# Altium PCB LM-008.PcbDoc (part 2 of 2)
Units mil, origin at the board's own origin, x right, y up, seen from the top; angles counter-clockwise.
Board outline 2402.07 x 2867.53 mil, 4 copper layers (Top Layer, Signal Layer 1, Signal Layer 2, Bottom Layer), stack 30.635 mil thick; 53 components, 52 nets, 456 pads, 38 vias.
Unrouted connection lines stored in the file: 15.
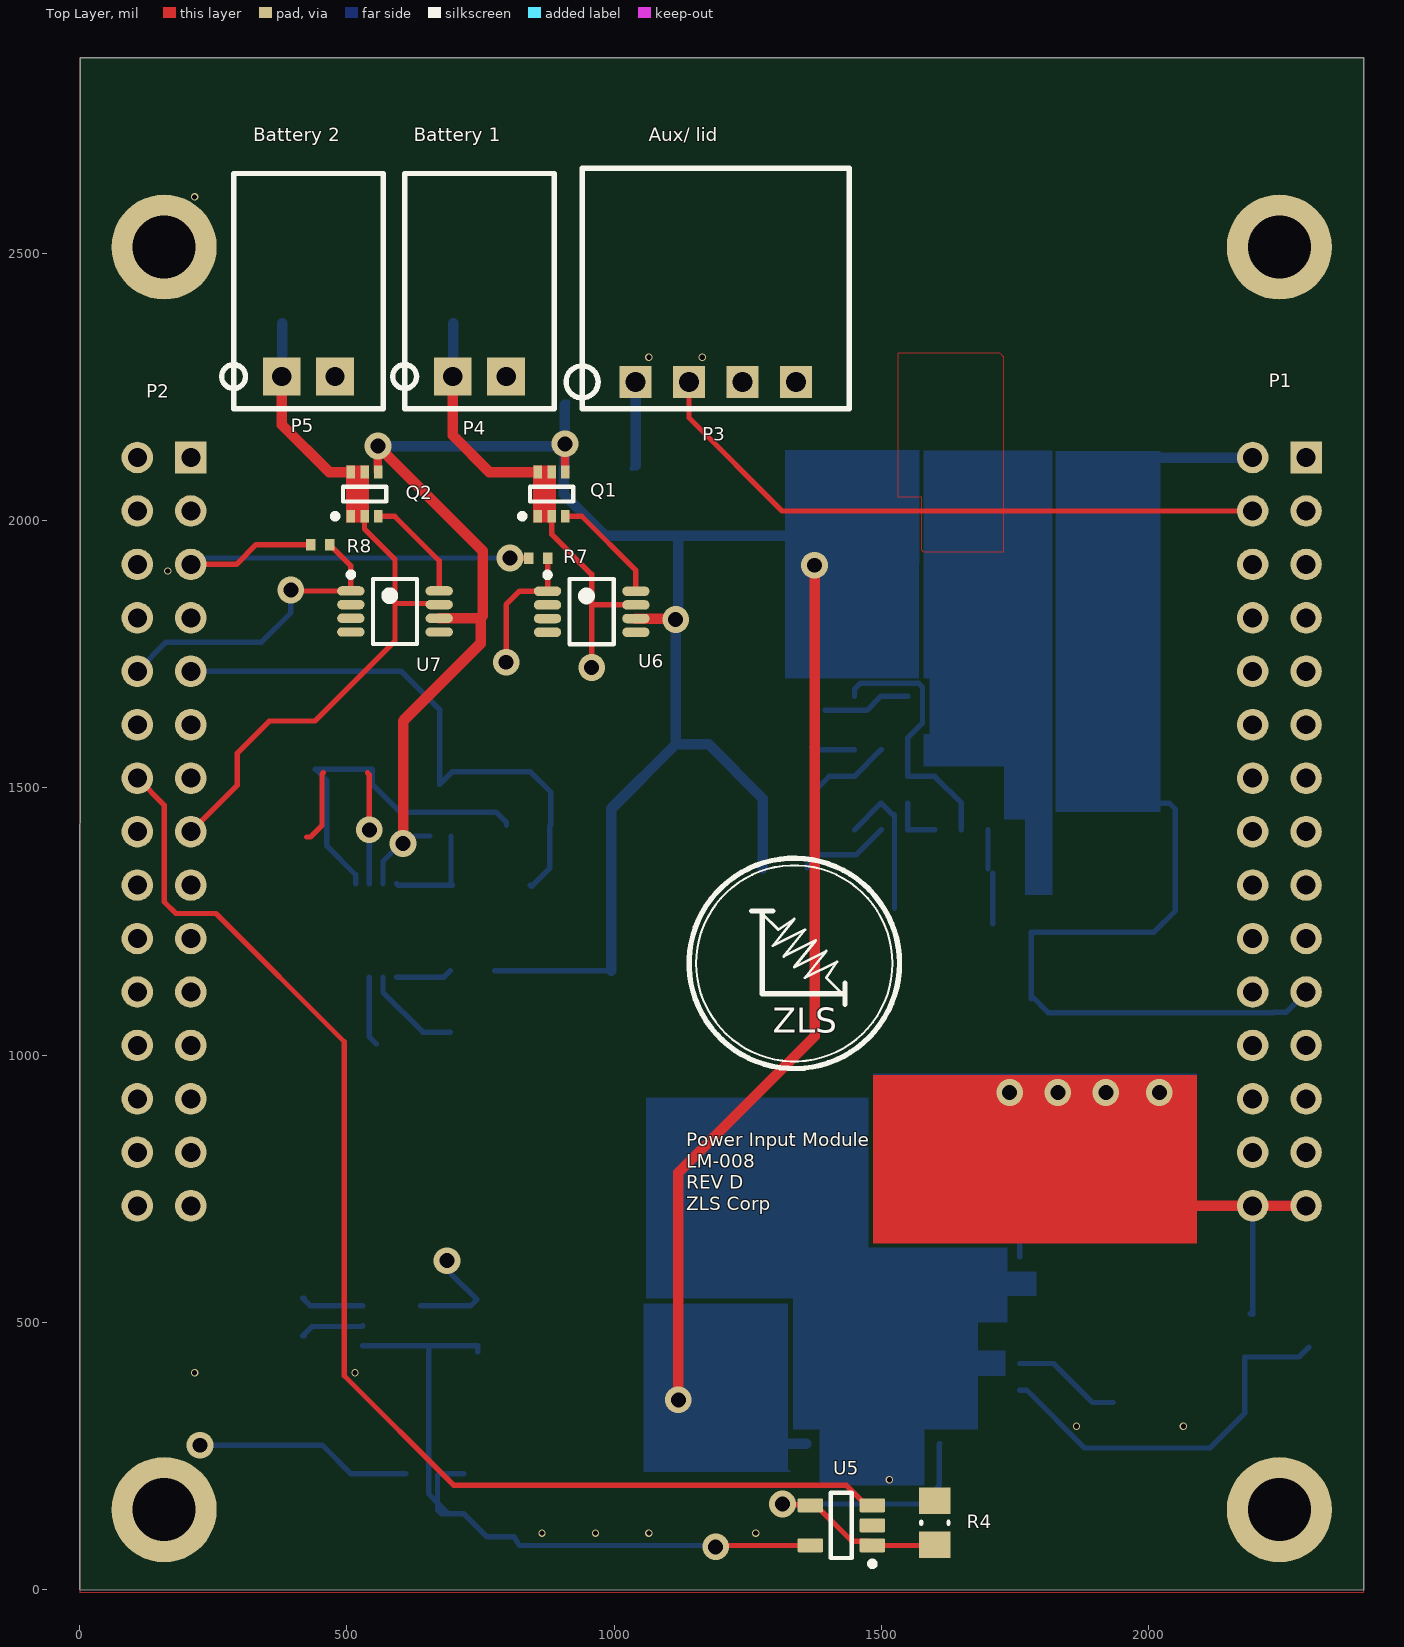
[diagram p0: Top Layer view]

## Via types
v1: diameter 50, hole 28, Top Layer to Bottom Layer, 21 vias
v2: diameter 13.78, hole 9.84, Top Layer to Bottom Layer, 13 vias
v3: diameter 19.68, hole 7.87, Top Layer to Bottom Layer, 4 vias

## Nets (pads, with @x,y where several pads share a name; then routed paths per layer and width w, separated by ;. In a path a pad name is that pad's centre, name@x,y a point inside that pad or via, vN(x,y) a via of type N, cw(c..) or ccw(c..) an arc to the next point about the centre after c; other vN are vias at no path point) (continued)
+5: (continued)
  Bottom Layer w10: U3.4 U3.3 U3.3@653.13,456.44 ; U1.1 672.19,216.5 669.59,213.9 669.59,162.24 ; C9.1 744.57,456.44 U3.3@653.13,456.44 ; v1@1192.6,82.6 822.38,82.6 C2.2 761.38,99.05 U1.3 690.13,141.7 ; 1780,1105 1780,1110.65 1780.43,1111.08 ; U9.J11 U9.J10 ; U9.J4 1882.13,1854.06 ; U9.J3 1882.13,1904.06 ; U9.J2 1882.13,1954.06 ; U9.J1 1882.13,2004.06 ; C27.1 1928.5,2118.08 1928.81,2117.77 ; U9.K11 U9.K10 U9.K9 ; U9.K1 1882.13,1954.06 ; 1929.1,2118.05 1928.81,2117.77 ; U9.L11 U9.L10 U9.L9 ; 1979.73,2120 1981.67,2118.05 ; 1981.15,2003.08 U9.L1 U9.K2 1882.13,1904.06 ; U9.M1 U9.L2 U9.K3 1882.13,1854.06 ; P1.21 2256.62,1080.08 2234.13,1080.08 2233.13,1079.08 1812.43,1079.08 1780.43,1111.08 ; U3.3@653.13,456.44 653.13,178.7 669.59,162.24 ; 669.59,162.24 690.13,141.7 ; 669.59,162.24 669.59,149.1 676.99,141.7 690.13,141.7 ; 1780.43,1111.08 C14.1 2010,1230 2050,1270 2050,1460 2038.5,1471.5 U9.M11 U9.M10 ; U9.J10 U9.J9 U9.J8 U9.J7 ; U9.J10 1882.13,1554.06 1882.13,1588.94 ; U9.J7 U9.J6 U9.J5 ; U9.J7 1882.13,1704.06 ; U9.J5 U9.J5@1851.1,1773.03 ; U9.J5 1849.57,1773.03 U9.J5@1851.1,1773.03 ; U9.J5@1851.1,1773.03 1882.13,1804.06 ; U9.J5@1851.1,1773.03 1882.13,1773.03 ; 1882.13,1588.94 1882.13,1638.94 ; 1882.13,1588.94 U9.K9 ; 1882.13,1638.94 U9.K8 ; 1882.13,1638.94 1882.13,1704.06 ; 1882.13,1704.06 1882.13,1773.03 ; 1882.13,1773.03 1882.13,1804.06 ; 1882.13,1804.06 U9.K4 ; 1882.13,1804.06 1882.13,1854.06 ; 1882.13,1854.06 1882.13,1904.06 ; 1882.13,1904.06 1882.13,1954.06 ; 1882.13,1954.06 1882.13,2004.06 ; 1882.13,2004.06 1882.13,2071.08 1928.81,2117.77 ; U9.K9 U9.K8 ; U9.K8 U9.L7 ; U9.K8 U9.L9 ; U9.K8 U9.K7 U9.K6 U9.K5 U9.K4 ; U9.K4 U9.L3 ; U9.K4 1899.57,1823.03 U9.L3@1949.57,1873.03 ; U9.L9 U9.L8 U9.L7 ; U9.L9 U9.M10 ; U9.L7 U9.M6 ; U9.L7 U9.L6 ; U9.L6 U9.M5 ; U9.L6 U9.L5 ; U9.L5 U9.M4 ; U9.L5 U9.L4 ; U9.L4 U9.M3 ; U9.L4 U9.L3 ; U9.L3 U9.M2 ; U9.L3 U9.L3@1949.57,1873.03 ; U9.L3@1949.57,1873.03 U9.M2@1999.57,1923.03 ; U9.M10 U9.M9 U9.M8 U9.M7 U9.M6 ; U9.M6 U9.M5 ; U9.M5 U9.M4 ; U9.M4 U9.M3 ; U9.M3 U9.M2 ; U9.M2 U9.M2@1999.57,1923.03 ; U9.M2 2001.1,1923.03 U9.M2@1999.57,1923.03
  Bottom Layer w19.68: 1981.67,2118.05 P1.2
+12: C5.2 C15.1 C22.1 L1.1 P1.29 P1.30 P2.13 R1.1 R6.1 U2.3 U4.A1 U4.A2 U4.A3 U4.A4 U4.A5 U4.A6 U4.B1 U4.B2 U4.B3 U4.B4 U4.B5 U4.B6 U4.C1 U4.C2 U4.C3 U4.C4 U4.C5 U4.C6 U4.D1 | length 3337
  Top Layer w10: 1995,730 2006.95,718.05
  Top Layer w19.68: 2006.95,718.05 P1.30 P1.29
  Signal Layer 1 w19.68: P1.30 P1.29
  Signal Layer 2 w19.68: P2.13 261.95,1518.05 300,1480 300,1380 750,930 v1(1740,930)
  Bottom Layer w10: U4.D1 U4.C1 ; R6.1 2194.59,515 P1.30
  Bottom Layer w19.68: P1.30 P1.29 ; v1(2870.82,1357.87) 3040.82,1187.87 v1(3540.82,1187.87)
  other v1: 1830,930 1920,930 2020,930
-5: C10.1 P1.25 P2.17 U3.1 | length 2773.7
  Signal Layer 1 w10: P2.17 321.95,1318.05 687.11,952.89 687.11,870 ; v1(687.11,615.34) 687.11,870 ; P1.25 2293.1,918.05 2244.59,869.55 687.56,869.55 687.11,870
  Bottom Layer w10: U3.1 731.81,531.24 740.06,539.5 743.02,542.46 694.77,590.71
Aux+: D1.1 P3.1 | length 164.5
  Bottom Layer w10: D1.1 D1.1@1039.98,2103.57
  Bottom Layer w19.68: D1.1@1039.98,2103.57 P3.1
Battery_1: C18.2 P2.11 P4.1 Q1.1 Q1.2 Q1.5 Q1.6 U6.7 | length 1730.4
  Top Layer w10: Q1.5 Q1.6 Q1.1 Q1.2 882.98,1974.55 957.98,1899.55 957.98,1842.35 ; v1(957.98,1725) 957.98,1842.35 ; U6.7 957.98,1842.35
  Top Layer w19.68: P4.1 697.98,2159.55 766.64,2090.89 Q1.6
  Signal Layer 1 w10: P2.11 863.06,1618.05 957.98,1712.98 v1(957.98,1725)
  Bottom Layer w10: P4.1 P4.1@698.92,2270.49
  Bottom Layer w19.68: P4.1@698.92,2270.49 C18.2
Battery_2: C19.2 P2.15 P5.1 Q2.1 Q2.2 Q2.5 Q2.6 U7.7 | length 1397.1
  Top Layer w10: P2.15 295,1505.08 295,1565 355,1625 440,1625 590,1775 590,1845 ; Q2.5 Q2.6 Q2.1 Q2.2 532.98,1984.55 590,1927.53 590,1845 ; U7.7 672.68,1845 590,1845
  Top Layer w19.68: P5.1 377.98,2179.55 466.64,2090.89 Q2.6
  Bottom Layer w10: P5.1 P5.1@378.92,2270.49
  Bottom Layer w19.68: P5.1@378.92,2270.49 C19.2
BBB_PWR_SW: P1.4 P3.2 | length 1193.9
  Top Layer w10: P3.2 1139.98,2192.48 1314.4,2018.05 P1.4
FB_CS0: P1.5
GND: C1.1 C2.1 C3.1 C4.1 C5.1 C6.1 C8.1 C9.2 C10.2 C12.2 C13.1 C15.2 C17.1 C18.1 C19.1 C21.1 C22.2 C26.2 C27.2 P1.1 P1.19 P1.20 P1.22 P1.23 P1.24 P1.27 P1.28 P2.3 P2.24 P2.27 P3.3 P3.4 P4.2 P5.2 R3.1 R4.2 R9.2 R10.2 R11.2 R13.2 U1.2 U2.8 U2.9 U3.2 U4.A7 U4.A8 U4.A9 U4.A10 U4.A11 U4.B7 U4.B8 U4.B9 U4.B10 U4.B11 U4.C7 U4.C8 U4.C9 U4.C10 U4.C11 U4.D2 U4.D3 U4.D4 U4.D5 U4.D6 U4.D7 U4.D8 U4.D9 U4.D10 U4.D11 U4.E1 U4.E2 U4.E3 U4.E4 U4.E5 U4.E6 U4.E7 U4.E8 U4.E9 U4.E10 U4.E11 U4.F2 U4.F3 U4.F4 U4.F5 U4.F6 U4.F7 U4.F8 U4.F9 U4.G3 U4.G4 U4.G5 U4.G6 U4.G7 U4.G8 U4.G9 U4.H2 U4.H3 U4.H4 U4.H5 U4.H6 U4.H7 U4.H8 U4.H9 U4.J3 U4.J4 U4.J5 U4.J6 U4.J7 U4.J8 U4.J9 U4.K3 U4.K4 U4.K5 U4.K6 U4.K7 U4.K8 U4.K9 U4.L1 U4.L5 U4.L6 U4.L7 U4.L8 U5.2 U6.2 U6.3 U7.2 U7.3 U9.C11 U9.C12 U9.D1 U9.D2 U9.D3 U9.D4 U9.D5 U9.D6 U9.D9 U9.D12 U9.E1 U9.E2 U9.E3 U9.E4 U9.E5 U9.E6 U9.E7 U9.E8 U9.F1 U9.F2 U9.F3 U9.F4 U9.F5 U9.F6 U9.F7 U9.F8 U9.F9 U9.G1 U9.G2 U9.G3 U9.G4 U9.G5 U9.G6 U9.G7 U9.G8 U9.G9 U9.G10 U9.G11 U9.H1 U9.H2 U9.H3 U9.H4 U9.H5 U9.H6 U9.H7 U9.H8 U9.H9 U9.H10 U9.H11 U9.H12 U9.M12 | length 100
  Bottom Layer w10: U9.C11 U9.C12 U9.D12
  other v2: 865,105.67 965,105.67 1065,105.67 1265,105.67 1515,205.67 1865,305.67 2065,305.67 215,405.67 515,405.67 165,1905.67 1065,2305.67 1165,2305.67 215,2605.67
NetC3_2: C3.2 R14.1 U2.2 | length 208.9
  Top Layer w10: 538.37,1527.99 542.01,1524.35 v1(542.01,1421.5) v1(542.01,1421.5)
  Bottom Layer w10: 542.03,1320.61 v1(542.01,1421.5)
NetC4_2: C4.2 R14.2 | length 44.6
  Top Layer w10: R14.2@3081.82,1406.52 C4.2@3081.82,1451.12
NetC6_2: C6.2 U2.7 | length 266.5
  Top Layer w10: 425,1407.99 431.89,1407.99 453.47,1429.57 453.47,1525.76 455.69,1527.99
  Bottom Layer w10: 542.05,1145.39 542.05,1033.78 554.85,1020.98
NetC11_1: C11.1 U3.5 | length 123.4
  Bottom Layer w10: C11.1 417.11,474.47 418.6,475.96 434.85,492.2 527.96,492.2 U3.5
NetC11_2: C11.2 U3.6 | length 121.2
  Bottom Layer w10: C11.2 417.11,545.34 418.51,543.94 431.21,531.24 U3.6
NetC12_1: C12.1 U9.B7 U9.C7 | length 165.6
  Bottom Layer w10: 1394.9,1645 1473.07,1645 U9.B7 U9.C7
NetC13_2: C13.2 U9.A9 | length 81
  Bottom Layer w10: C13.2 1373.5,1571.5 U9.A9
NetC14_2: C14.2 R3.2 U9.F12 | length 167.4
  Bottom Layer w10: R3.2@1699.57,1348.66 U9.F12 ; C14.2@1708.23,1245.43 R3.2
NetD2_1: D2.1 L1.2 U2.4 | length 198
  Bottom Layer w10: 593.24,1320.59 595.77,1318.05 697.17,1318.05 694.69,1320.53 694.69,1410
NetP1_11: P1.11
NetP1_13: P1.13
NetP1_15: P1.15
NetP1_18: P1.18
NetP2_2: P2.2
NetP2_8: P2.8 R7.1 U6.1 | length 981.8
  Top Layer w10: v1(797.98,1735) 797.98,1842.98 822.94,1867.94 U6.1 875.69,1868.33 R7.1
  Signal Layer 1 w10: P2.8 156.03,1770 270,1770 305,1735 v1(797.98,1735)
NetP2_10: P2.10 R8.1 U7.1 | length 591.4
  Top Layer w10: v1(395,1870) 396.62,1868.39 U7.1 507.32,1915.39 R8.1
  Bottom Layer w10: P2.10 107.98,1718.94 161.59,1772.55 340,1772.55 395,1827.55 v1(395,1870)
NetP2_14: P2.14 U5.3 | length 2411
  Top Layer w10: P2.14 158.01,1468.02 158.01,1286.83 179.84,1265 255,1265 495,1025 495,400 700,195 1434.65,195 1472.25,157.4 U5.3
NetP2_18: P2.18
NetP2_21: P2.21
NetP2_22: P2.22
NetP2_26: P2.26
NetP2_28: P2.28
NetQ1_3: Q1.3 U6.8 | length 213
  Top Layer w10: Q1.3 939.32,2008.21 1040.66,1906.87 U6.8
NetQ2_3: Q2.3 U7.8 | length 205.1
  Top Layer w10: Q2.3 589.32,2008.21 672.68,1924.85 U7.8
NetR1_2: R1.2 U2.5 | length 105.5
  Bottom Layer w10: 593.24,1145.39 680.91,1145.39 693.51,1157.99
NetR2_1: R2.1 U2.1
NetR5_2: R5.2 U9.B12 | length 171.2
  Bottom Layer w10: R5.2 1360.91,1354.92 1380.51,1374.53 1452.6,1374.53 U9.B12
NetR6_2: R6.2 R9.1 U4.J1 | length 725.4
  Bottom Layer w10: U4.J1 1772,373 1880,265 2115,265 2180,330 2180,435 2281.34,435 R9.1@2300,453.66
NetR10_1: R10.1 U4.H1 | length 204.9
  Bottom Layer w10: U4.H1 1822,423 1895,350 R10.1
NetR11_1: R11.1 U2.6 | length 184.7
  Bottom Layer w10: 567.64,1145.39 567.64,1117.36 642.01,1042.99 693.51,1042.99
NetR12_1: R12.1 U9.A10 U9.B9 | length 175.9
  Bottom Layer w10: R12.1@1374.57,1475 1374.57,1493.58 1402.48,1521.5 U9.A10 U9.B9
NetR13_1: R13.1 U9.A12 U9.B11 | length 279.6
  Bottom Layer w10: U9.A12 U9.B11 1521.07,1450 1524.57,1450 R13.1@1524.57,1275
NetU9_A7: U9.A7 U9.C10 U9.E11 U9.E12 | length 496.9
  Bottom Layer w10: U9.A7 1449.57,1684.57 1460.93,1695.93 1569.07,1695.93 1576.77,1688.23 1576.77,1621.09 1549.57,1593.88 U9.C10 1599.57,1521.5 U9.E11 U9.E12
Power_CS0: P1.9
Power_IN: C17.2 C21.2 C26.1 D1.2 Q1.4 Q2.4 R5.1 R12.2 U4.F10 U4.F11 U4.G10 U4.G11 U4.H10 U4.H11 U4.J10 U4.J11 U4.K10 U4.K11 U4.L9 U4.L10 U4.L11 U6.6 U7.6 U9.A1 U9.A2 U9.A3 U9.A4 U9.A5 U9.A6 U9.B1 U9.B2 U9.B3 U9.B4 U9.B5 U9.B6 U9.C1 U9.C2 U9.C3 U9.C4 U9.C5 U9.C6 | length 5542.1
  Top Layer w10: Q2.4@557.98,2091.48 Q2.4 ; v1@1113.25,1816.75 v1(1115,1815)
  Top Layer w15.75: Q2.4@557.98,2091.48 v1(557.98,2139.55) ; v1(907.98,2143.55) 907.98,2094.48 Q1.4
  Top Layer w19.68: v1(557.98,2139.55) 754.39,1943.14 754.39,1821.59 750,1817.2 ; U7.6 750,1817.2 ; U6.6 v1@1113.25,1816.75 ; v1(1120,355) 1120,780 1375,1035 v1(1375,1916.5) ; v1(605,1396.08) 603.04,1398.04 v1(605,1396.08) ; v1(605,1396.08) 605,1625 750,1770 750,1817.2
  Bottom Layer w10: 567.64,1320.59 567.64,1362.64 603.04,1398.04 614.91,1398.04 626.86,1410 655.32,1410 ; 776.19,1157.99 995,1157.99 ; D1.2 D1.2@907.98,2099.53 ; C17.2@907.98,2216.5 C17.2 ; 1120,1966.5 1125,1971.5
  Bottom Layer w19.68: v1(557.98,2139.55) 903.98,2139.55 v1(907.98,2143.55) ; D1.2 906,2049 983.5,1971.5 1125,1971.5 U9.A1 ; D1.2@907.98,2099.53 v1(907.98,2143.55) ; C17.2@907.98,2216.5 v1(907.98,2143.55) ; 995,1157.99 995,1461.29 1115,1581.29 ; v1@1113.25,1816.75 v1(1115,1815) ; 1120,1966.5 1120,1815 v1(1115,1815) ; R5.1 R12.2 1278.23,1479.92 1176.86,1581.29 1115,1581.29 ; U4.L10 U4.L9 ; 1115,1581.29 v1(1115,1815)
PWM1A: P1.8
RC: R4.1 U4.L4 U5.1 U5.4 | length 696.2
  Top Layer w10: v1@1320,160 1321.3,158.7 1365.63,158.7 U5.4 1377.76,157.4 1444.76,90.39 1475.28,90.39 U5.1 1598.94,82.6 R4.1
  Bottom Layer w10: v1@1321.3,158.7 1320,160 1574.57,160 1608.07,193.5 1608.07,272.06 U4.L4
  other v1: 1315,160
SPI0_MISO: P1.12
SPI0_MOSI: P1.10
SPI0_SCLK: P1.14
ZH: P2.9 | length 1063.7
  Bottom Layer w10: P2.9 601.95,1718.05 673.45,1646.55 673.45,1535 673.45,1506.46 696.99,1530 843.43,1530 881.34,1492.08 881.34,1430 879.33,1427.99 879.33,1349.33 845.45,1315.44 842.84,1318.05
ZP: C8.2 D2.2 R2.2
pads on no net: P1.3 P1.6 P1.7 P1.16 P1.17 P2.4 P2.6 P2.7 P2.12 P2.16 P2.19 P2.20 P2.23 P2.25 P2.29 P2.30 U1.4 U4.F1 U4.G1 U4.G2 U4.J2 U4.K1 U4.K2 U4.L2 U4.L3 U6.4 U6.5 U7.4 U7.5 U9.A8 U9.A11 U9.D11 U9.G12 U9.J12 U9.K12 U9.L12
copper on no net: | length 666.5
  Bottom Layer w10: 516.46,1320.59 516.46,1337.32 462.55,1391.24 462.55,1513.42 440.97,1535 547.47,1535 547.47,1506.46 599.4,1454.53 779.06,1454.53 798.66,1434.92 798.66,1430
  other v3: 3358.35,1319.97 3401.65,1319.97 3358.35,1363.28 3401.65,1363.28

## Polygon pours and split planes (outlines as drawn)
ZH on Bottom Layer "ZH" (solid, shelved, pour order 6): 1034.7,1198.41 534.7,1198.41 534.7,1098.41 544.7,1108.41 1034.7,1108.41
GND on Bottom Layer "NONET_L04_P004" (solid, shelved, pour order 4): 2402.07,2866.13 2402.07,-0.92 0,-0.92 0,2866.13
+5 on Bottom Layer "5V" (solid, shelved, pour order 0): 2200.13,2394.98 1790.13,2394.98 1790.13,2544.98 2200.13,2544.98
no net on Bottom Layer "C21_1" (solid, shelved, pour order 8): 1818.87,2360.49 1598.87,2360.49 1598.87,2170.49 1688.87,2170.49 1688.87,2280.49 1818.87,2280.49
GND on Bottom Layer "GND" (solid, shelved, pour order 10): 2228.87,2730.49 2228.87,2110.49 1318.87,2110.49 1318.87,2730.49
GND on Top Layer "NONET_L01_P002" (solid, shelved, pour order 2): 0,2866.13 0,-4.92 2402.07,-4.92 2402.07,2866.13
+5 on Top Layer "NONET_L01_P014" (solid, shelved, pour order 14): 1530.51,2044.29 1574.8,2044.29 1574.8,1945.87 1578.74,1941.93 1729.33,1941.93 1729.33,2306.1 1722.44,2312.99 1530.51,2312.99
GND on Signal Layer 1 "NONET_L02_P012" (solid, shelved, pour order 12): -4.22,2869.83 -4.22,-1.22 2397.85,-1.22 2397.85,2869.83

## Other copper
Top Layer:
  region net +12: 3318.82,1317.87 2841.82,1317.87 2841.82,1336.87 3201.82,1336.87 3318.82,1336.87
  region net NetD2_1: 3069.82,1310.87 3069.82,1107.87 3257.82,1107.87 3257.82,1291.87 3319.82,1291.87 3319.82,1310.87
  region net NetC3_2: 3319.82,1343.87 3019.82,1343.87 3019.82,1361.87 3202.82,1361.87 3319.82,1361.87
  region net NetR2_1: 3319.82,1370.87 3202.82,1370.87 3202.82,1403.87 3319.82,1403.87
  region net +12: 3008.07,1261.87 2841.82,1261.87 2841.82,1381.87 3008.07,1381.87
  region net NetD2_1: 3112.32,1107.87 2841.82,1107.87 2841.82,1210.87 2995.32,1210.87 3112.32,1210.87
  region net ZP: 3250.82,1412.87 3130.82,1412.87 3130.82,1527.87 3250.82,1527.87
  region net NetC6_2: 3451.82,1361.87 3542.82,1361.87 3542.82,1343.87 3451.82,1343.87
  region net NetR11_1: 3450.82,1336.87 3595.82,1336.87 3595.82,1318.87 3450.82,1318.87
  region net NetR1_2: 3440.82,1309.87 3560.82,1309.87 3560.82,1277.87 3440.82,1277.87
  region net +12: 3523.32,1168.87 3523.32,1259.87 3560.82,1259.87 3560.82,1168.87
  region net +12: 1485,647.5 2090,647.5 2090,962.5 1485,962.5
  region net Battery_2: 540.98,2102.55 540.98,1996.55 498.98,1996.55 498.98,2102.55
  region net Battery_1: 890.98,2102.55 890.98,1996.55 848.98,1996.55 848.98,2102.55
Bottom Layer:
  pour cut-out: 1805,300 1730,300 1730,240 1594.26,240 1590,240 1590,295.74 1684.26,295.74 1684.26,395.74 1734.47,395.74 1734.47,450.02 1684.26,450.02 1684.26,495.74 1739.26,495.74 1739.26,544.26 1805,544.26
  region: 1170,440
  region net Power_IN: 1055,535 1325,535 1325,225 1330,220 1055,220
  region net GND: 1735,595 1789.95,595 1790,550 1735,550 1735,500 1680,500 1680,447.01 1731.46,447.01 1731.46,400 1680,400 1680,300 1580,300 1580,195 1385,195 1385,300 1335,300 1335,545 1060,545 1060,920 1475,920 1475,640 1735,640
  region net +12: 1485,650 2090,650 2090,965 1485,965
  region net GND: 1579.57,1600 1590,1600 1590,1705 1580.79,1705 1579.57,1705.79 1579.57,2131.5 1819.49,2130.56 1819.49,1411.58 1819.49,1300 1769.57,1300 1769.57,1441.5 1729.57,1441.5 1729.57,1540 1579.57,1540
  region net +5: 2021.61,2130 1826.49,2130 1826.49,1455 2021.61,1455
  region net Power_IN: 1320,1705.15 1569.56,1704.86 1570.49,2131.5 1320,2131.5

## Silkscreen, mask and mechanical layers (free items; w line width, h text height)
Top Overlay:
  circle w10: c1337.02,1171.61 r196.85
  circle w3.94: c1337.02,1171.61 r183.58
  lines w5: 1277.02,1264.61 1307.02,1234.61 1337.02,1254.61 1297.02,1204.61 1357.02,1234.61 1317.02,1184.61 1377.02,1214.61 1337.02,1164.61 1397.02,1194.61 1357.02,1144.61 1417.02,1174.61 1397.02,1144.61 1427.02,1114.61
  lines w10: 1257.02,1269.61 1297.02,1269.61 ; 1277.02,1264.61 1277.02,1114.61 1427.02,1114.61 ; 1432.02,1094.61 1432.02,1134.61
  text "Battery 2" at 324.59,2709.55 h25.59
  text "Battery 1" at 624.59,2709.55 h25.59
  text "Aux/ lid" at 1064.59,2709.55 h25.59
  text "P1" at 2224.59,2249.55 h25.59
  text "P2" at 124.59,2229.55 h25.59
  text "ZLS" at 1297.02,1041.61 h47.24
  text "Power Input Module" at 1134.59,829.55 h25.59
  text "LM-008" at 1134.59,789.55 h25.59
  text "REV D" at 1134.59,749.55 h25.59
  text "ZLS Corp" at 1134.59,709.55 h25.59

## Dimensions
2244.59,149.55 to 2401.98,-1.45 on Mechanical 13
-110.13,-0.45 to 1.04,2866.04 on Mechanical 13
157.98,149.55 to 0.5,-7.93 on Mechanical 13
157.98,149.55 to 2244.59,149.55 on Mechanical 13
2244.59,149.55 to 2244.59,2511.75 on Mechanical 1

## Text inside footprints (layer, text, board x,y; h text height)
P1: Bottom Overlay "30" at 2205,650 h25.59 r90; Bottom Overlay "29" at 2310,645 h25.59 r90; Bottom Overlay "2" at 2214.59,2218.05 h50 r90; Bottom Overlay "1" at 2314.59,2218.05 h50 r90
P2: Bottom Overlay "1" at 227.98,2218.05 h50 r90; Bottom Overlay "2" at 127.98,2218.05 h50 r90; Bottom Overlay "29" at 224.59,629.55 h50 r90; Bottom Overlay "30" at 124.59,629.55 h50 r90